# Altium PCB smarthome.PcbDoc
Units mil, origin at the board's own origin, x right, y up, seen from the top; angles counter-clockwise.
Board outline 6000 x 4000 mil, 2 copper layers (Top Layer, Bottom Layer); 21 components, 42 nets, 109 pads, 0 vias.
Unrouted connection lines stored in the file: 50.
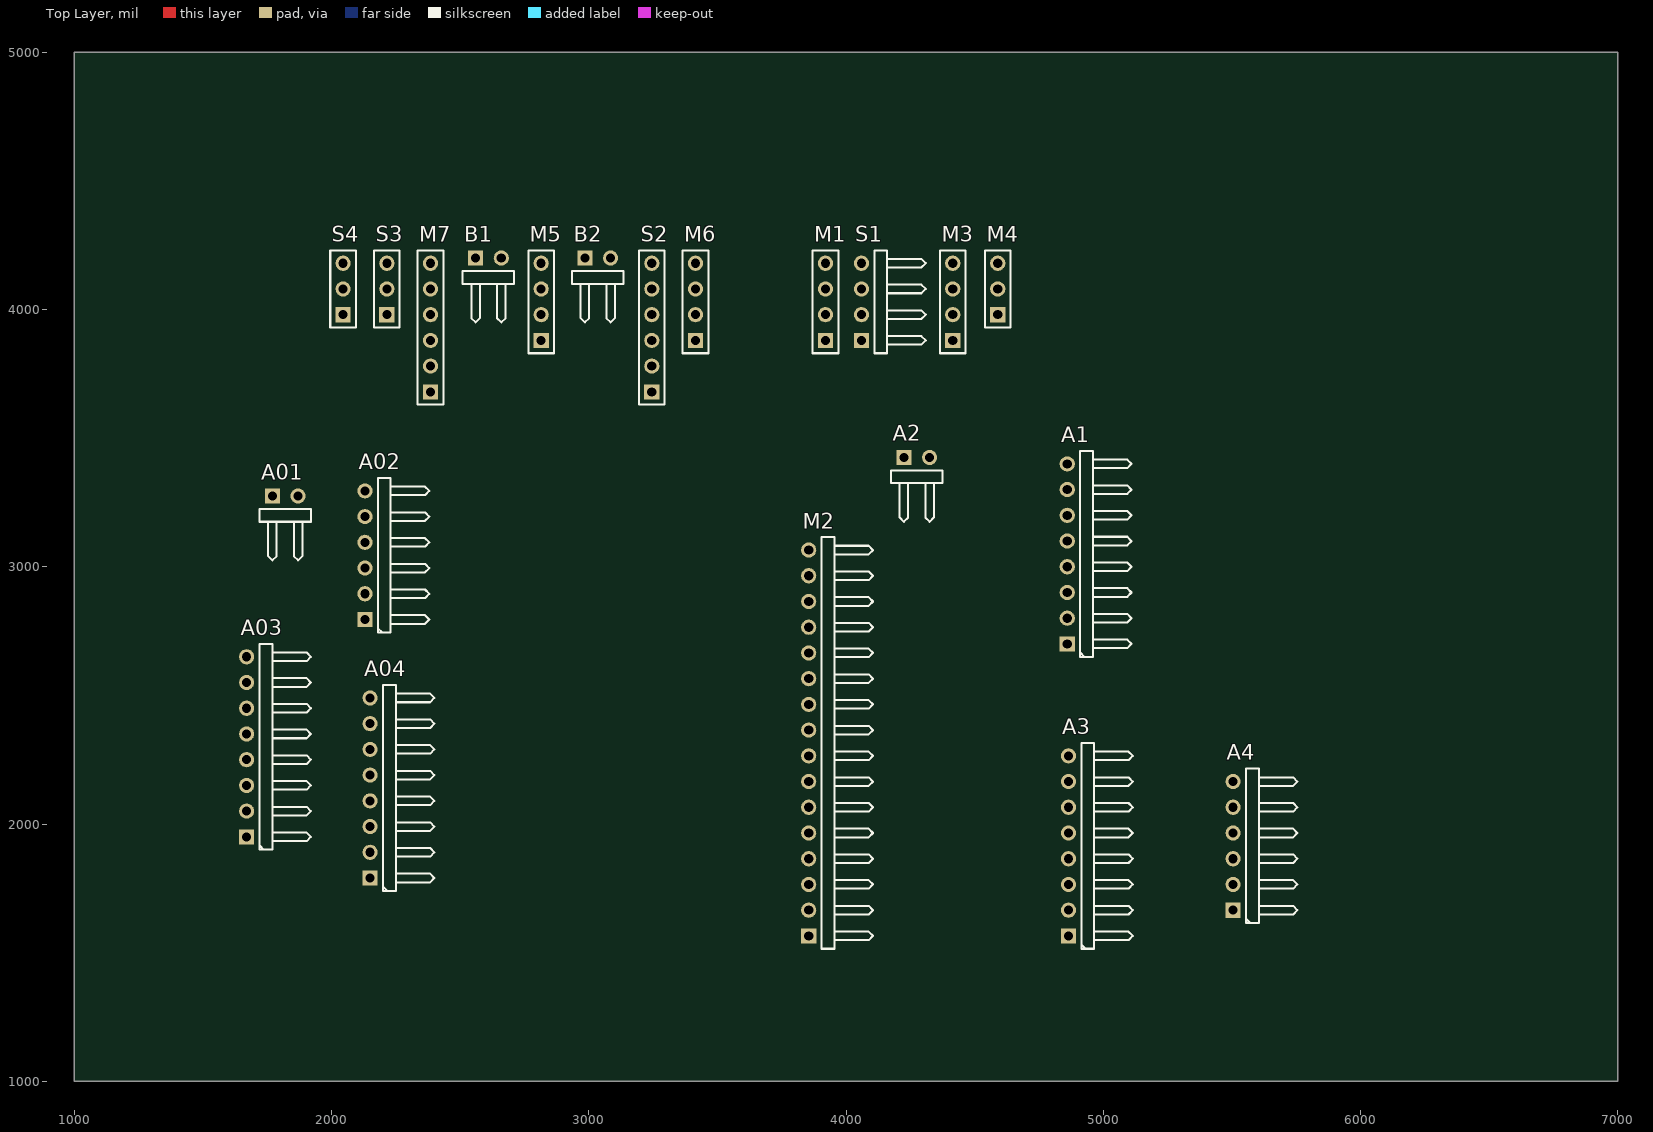
[diagram p0: Top Layer view]
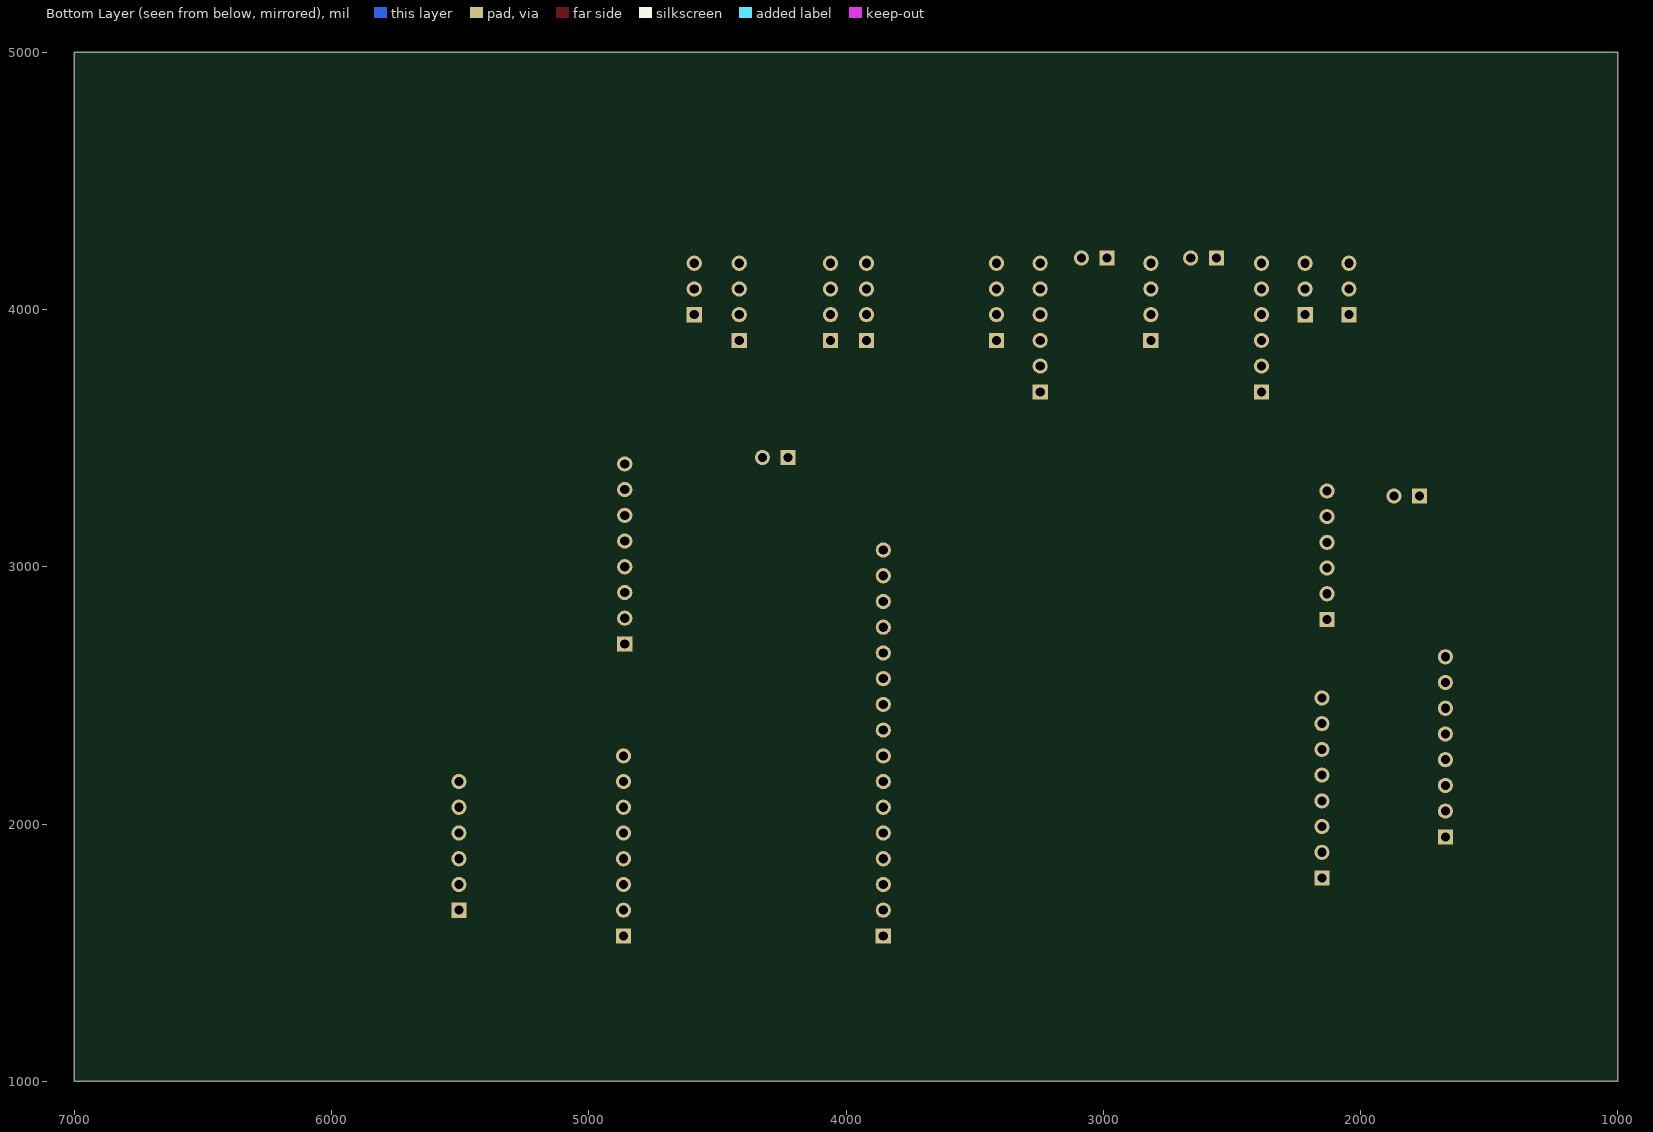
[diagram p1: Bottom Layer view, seen from below]

## Layer stack, top to bottom
Top Solder: solder mask 0.4, Solder Resist, Dk 3.5
Top Layer: signal copper 1.4
Dielectric 1: dielectric 12.6, FR-4, Dk 4.8
Bottom Layer: signal copper 1.4
Bottom Solder: solder mask 0.4, Solder Resist, Dk 3.5

## Board outline
1000,1000 7000,1000 7000,5000 1000,5000

## Design rules (kind name [scope] priority, off if disabled: settings)
Clearance [All] p1: gap=10 ignorepadtopadclearanceinfootprint=FALSE except(0: Arc-Hole Track-Hole SMDPad-Hole THPad-Hole Via-Hole Fill-Hole Poly-Hole Region-Hole Text-Hole)
PolygonConnect [All] p1: connectstyle=Relief reliefconductorwidth=10 reliefentries=4 polygonreliefangle="90 Angle" airgapwidth=10
RoomDefinition smarthome_ALL [InComponentClass('smarthome_ALL')] p1: confinementstyle=ConfineIn formatcopy=TRUE lockcomponents=FALSE outline 1395,1270 7200,1270 7200,4340 1395,4340
RoutingVias [All] p1: holewidth=28 width=50 viastyle="Through Hole" minholewidth=28 minwidth=50 maxholewidth=28 maxwidth=50
SolderMaskExpansion [All] p1: expansion=4
Width [All] p1: maxlimit=10 minlimit=10 preferedwidth=10
30 further rules are at their usual default settings.

## Components (designator, comment, footprint, x,y, rotation, side; value= is the part's Value field where it differs from the comment)
A1 "ARD2(Digital2)" HDR1X8H 4860,2700 r90 top
A01 "ARD1(Power)" HDR1X2H 1770,3275 r0 top
A2 "ARD2(Power)" HDR1X2H 4225,3425 r0 top
A02 "ARD1(Analog)" HDR1X6H 2130,2795 r90 top
A3 "ARD2(Digital)" HDR1X8H 4865,1565 r90 top
A03 "ARD1(Digital)" HDR1X8H 1670,1950 r90 top
A4 "ARD2(Analog)" HDR1X6H 5505,1665 r90 top
A04 "ARD1(Digital2)" HDR1X8H 2150,1790 r90 top
B1 "Buzzer" HDR1X2H 2560,4200 r0 top
B2 "Buzzer" HDR1X2H 2985,4200 r0 top
M1 "RGB" HDR1X4 3920,3880 r90 top
M2 "1602 LCD" HDR1X16H 3855,1565 r90 top
M3 "RGB" HDR1X4 4415,3880 r90 top
M4 "LM35" HDR1X3 4590,3980 r90 top
M5 "ELB080005 LED" HDR1X4 2815,3880 r90 top
M6 "SZH-SSBH-011" HDR1X4 3415,3880 r90 top
M7 "Steppervmotor" HDR1X6 2385,3680 r90 top
S1 "SZH-EK105" HDR1X4H 4060,3880 r90 top
S2 "SZH_SSBH_006" HDR1X6 3245,3680 r90 top
S3 "SZH_052" HDR1X3 2215,3980 r90 top
S4 "SZH_052" HDR1X3 2045,3980 r90 top

## Footprints (in the part's own frame and the unit in brackets; to place one, negate y for a bottom-side part, rotate by r counter-clockwise, add the part's x,y. Pads: shape width x height; smd on the part's side, far side on the other; paste and mask are expansions set on the pad)
HDR1X2H [mm] "Connector; Header; 2 Position; Right Angle"
  rect 1.5x1.5 hole 0.9: 1(0,0)
  round 1.5 hole 0.9: 2(2.54,0)
  silkscreen extent -1.27,-6.35 3.81,-1.27
HDR1X3 [mm] "Connector; Header; 3 Position"
  rect 1.5x1.5 hole 0.9: 1(0,0)
  round 1.5 hole 0.9: 2(2.54,0) 3(5.08,0)
  silkscreen extent -1.27,-1.27 6.35,1.27
HDR1X4 [mm] "Connector; Header; 4 Position"
  rect 1.5x1.5 hole 0.9: 1(0,0)
  round 1.5 hole 0.9: 2(2.54,0) 3(5.08,0) 4(7.62,0)
  silkscreen extent -1.27,-1.27 8.89,1.27
HDR1X4H [mm] "Connector; Header; 4 Position; Right Angle"
  rect 1.5x1.5 hole 0.9: 1(0,0)
  round 1.5 hole 0.9: 2(2.54,0) 3(5.08,0) 4(7.62,0)
  silkscreen extent -1.27,-6.35 8.89,-1.27
HDR1X6 [mm] "Connector; Header; 6 Position"
  rect 1.5x1.5 hole 0.9: 1(0,0)
  round 1.5 hole 0.9: 2(2.54,0) 3(5.08,0) 4(7.62,0) 5(10.16,0) 6(12.7,0)
  silkscreen extent -1.27,-1.27 13.97,1.27
HDR1X6H [mm] "Connector; Header; 6 Position; Right Angle"
  rect 1.5x1.5 hole 0.9: 1(0,0)
  round 1.5 hole 0.9: 2(2.54,0) 3(5.08,0) 4(7.62,0) 5(10.16,0) 6(12.7,0)
  silkscreen extent -1.27,-6.35 13.97,-1.27
HDR1X8H [mm] "Connector; Header; 8 Position; Right Angle"
  rect 1.5x1.5 hole 0.9: 1(0,0)
  round 1.5 hole 0.9: 2(2.54,0) 3(5.08,0) 4(7.62,0) 5(10.16,0) 6(12.7,0) 7(15.24,0) 8(17.78,0)
  silkscreen extent -1.27,-6.35 19.05,-1.27
HDR1X16H [mm] "Connector; Header; 16 Position; Right Angle"
  rect 1.5x1.5 hole 0.9: 1(0,0)
  round 1.5 hole 0.9: 2(2.54,0) 3(5.08,0) 4(7.62,0) 5(10.16,0) 6(12.7,0) 7(15.24,0) 8(17.78,0) 9(20.32,0) 10(22.86,0) 11(25.4,0) 12(27.94,0) 13(30.48,0) 14(33.02,0) 15(35.56,0) 16(38.1,0)
  silkscreen extent -1.27,-6.35 39.37,-1.27

## Part data
A1 A3 A03 A04: library part "Header 8H", "Header, 8-Pin, Right Angle", LatestRevisionDate=17-Jul-2002, LatestRevisionNote="Re-released for DXP Platform.", Publisher="Altium Limited"
A01 A2 B1 B2: library part "Header 2H", "Header, 2-Pin, Right Angle", LatestRevisionDate=17-Jul-2002, LatestRevisionNote="Re-released for DXP Platform.", Publisher="Altium Limited"
A02 A4: library part "Header 6H", "Header, 6-Pin, Right Angle", LatestRevisionDate=17-Jul-2002, LatestRevisionNote="Re-released for DXP Platform.", Publisher="Altium Limited"
M1 M3 M5 M6: library part "Header 4", "Header, 4-Pin", LatestRevisionDate=17-Jul-2002, LatestRevisionNote="Re-released for DXP Platform.", Publisher="Altium Limited"
M2: library part "Header 16H", "Header, 16-Pin, Right Angle", LatestRevisionDate=17-Jul-2002, LatestRevisionNote="Re-released for DXP Platform.", Publisher="Altium Limited"
M4 S3 S4: library part "Header 3", "Header, 3-Pin", LatestRevisionDate=17-Jul-2002, LatestRevisionNote="Re-released for DXP Platform.", Publisher="Altium Limited"
M7 S2: library part "Header 6", "Header, 6-Pin", LatestRevisionDate=17-Jul-2002, LatestRevisionNote="Re-released for DXP Platform.", Publisher="Altium Limited"
S1: library part "Header 4H", "Header, 4-Pin, Right Angle", LatestRevisionDate=17-Jul-2002, LatestRevisionNote="Re-released for DXP Platform.", Publisher="Altium Limited"

## Nets (pads, with @x,y where several pads share a name; then routed paths per layer and width w, separated by ;. In a path a pad name is that pad's centre, name@x,y a point inside that pad or via, vN(x,y) a via of type N, cw(c..) or ccw(c..) an arc to the next point about the centre after c; other vN are vias at no path point)
+5: A01.1 A2.1 M2.15 M4.3 M5.4 M6.4 S2.6 S3.3 S4.3
+5V: M2.2 M7.2 S1.3
A00: A02.1 M1.4
A0: M4.2
A1: M6.1
A01: A02.2 M1.3
A2: A4.3 M7.3
A02: A02.3 M1.2
A03: A02.4
A3: A4.4 M7.4
A04: A02.5
A4: A4.5 M7.5
A05: A02.6
A5: A4.6 M7.6
D00: A03.1
D0: A3.1 M3.4
D1: A3.2 M3.3
D01: A03.2 S1.4
D2: A3.3 M2.3
D02: A03.3 S2.4
D3: A3.4 M2.4
D03: A03.4 S2.3
D4: A3.5 M2.5
D04: A03.5 S2.2
D5: A3.6 M2.6
D05: A03.6 S2.1
D6: A3.7
D06: A03.7
D7: A3.8
D07: A03.8 B1.2
D8: A1.1
D08: A04.1 M5.1
D9: A1.2
D09: A04.2 M5.2
D10: A1.3 B2.2 M2.11
D010: A04.3
D11: A1.4 M2.12
D011: A04.4
D012: A04.5
D12: M2.13
D13: M3.2
GND: A01.2 A2.2 B1.1 B2.1 M1.1 M2.1 M2.14 M2.16 M3.1 M4.1 M5.3 M6.3 M7.1 S1.2 S2.5 S3.1 S4.1
pads on no net: A1.5 A1.6 A1.7 A1.8 A4.1 A4.2 A04.6 A04.7 A04.8 M2.7 M2.8 M2.9 M2.10 M6.2 S1.1 S3.2 S4.2